# EAGLE board All_in_One_Boards_V1.0 (EAGLE 9.6.2), part 1 of 2
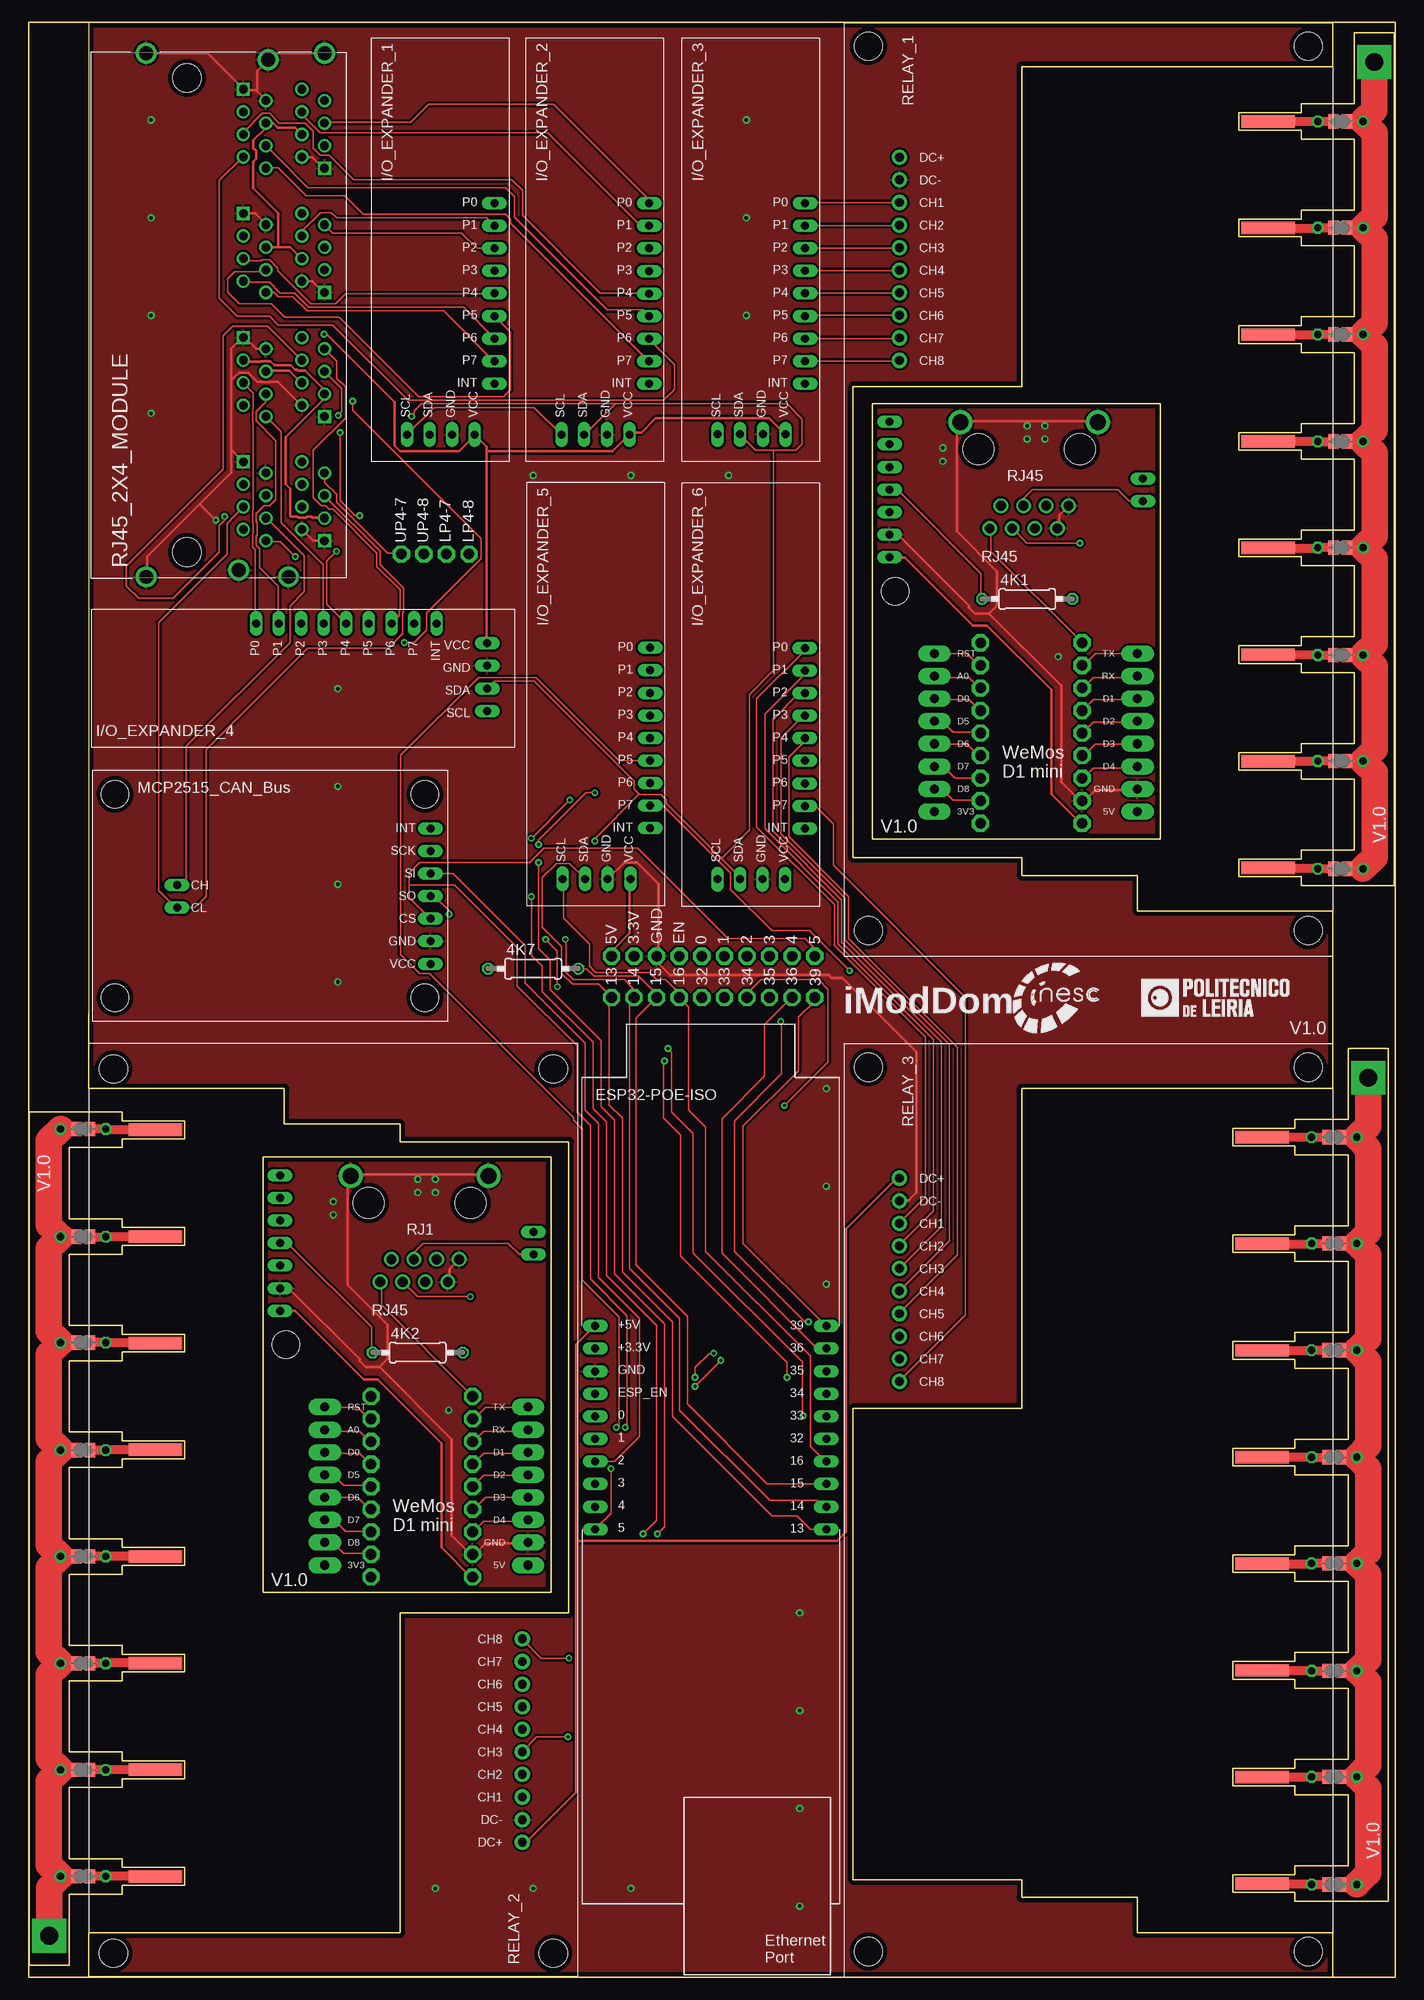
[diagram p0: board, top side]
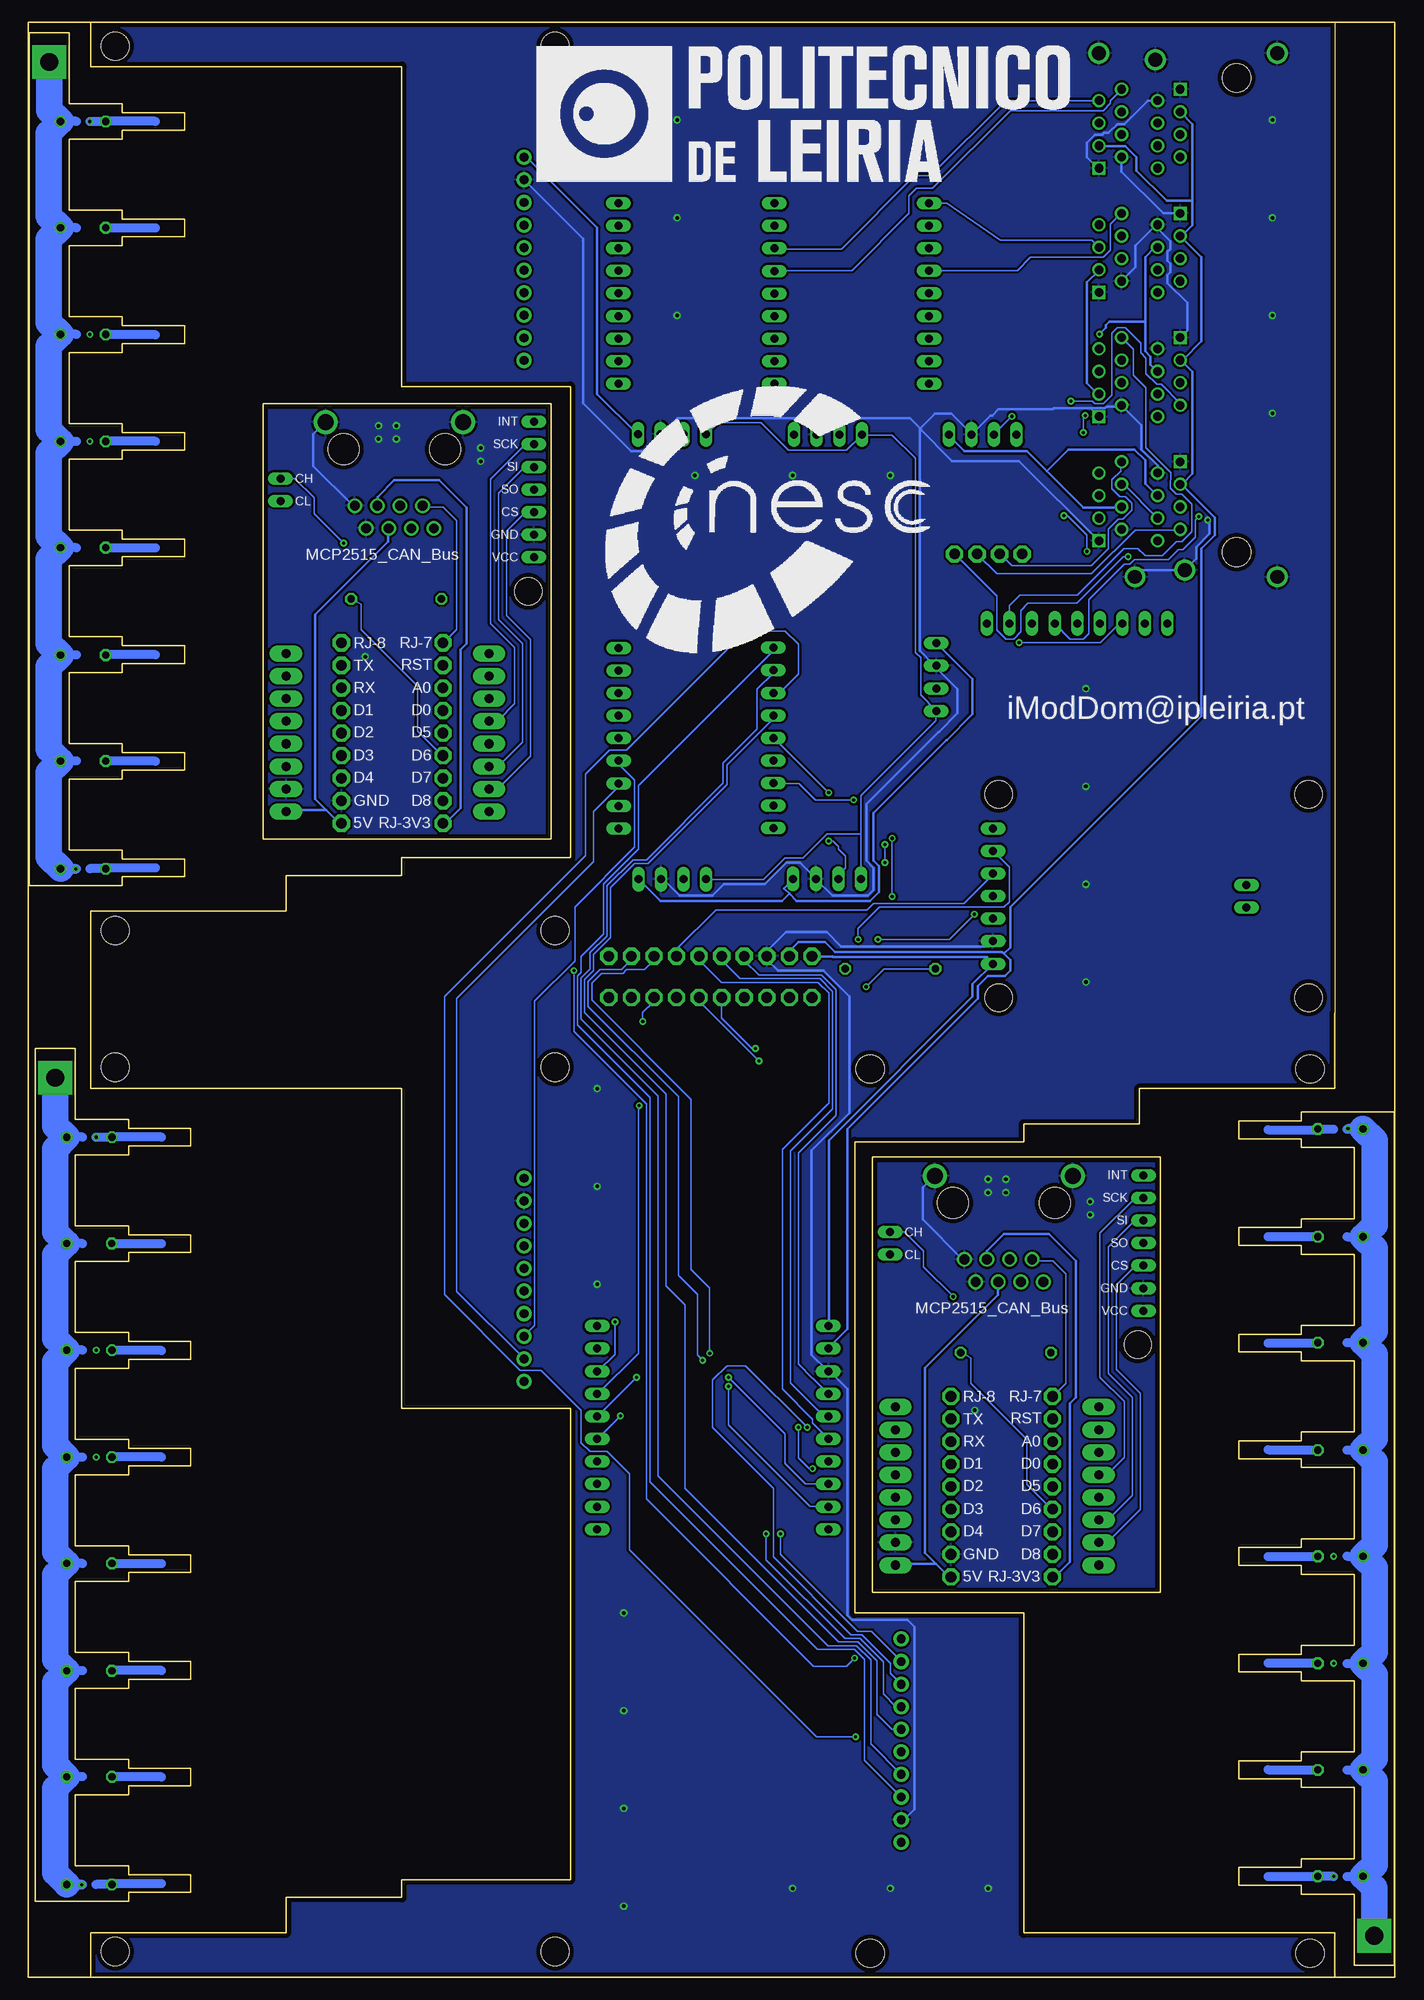
[diagram p1: board, bottom side, seen from below]

Size 153.75 x 220 mm. Coordinates in mm from the lower left corner, seen from the top.
Outline: 6.75,0 146.75,0 146.75,5 124.75,5 124.75,9 111.75,9 111.75,11 92.75,11 92.75,64 111.75,64 111.75,100 146.75,100 146.75,120 124.75,120 124.75,124 111.75,124 111.75,126 92.75,126 92.75,179 111.75,179 111.75,215 146.75,215 146.75,220
Outline: 146.75,220 6.75,220 6.75,108.5 6.75,100 28.75,100 28.75,96 41.75,96 41.75,94 60.75,94 60.75,41 41.75,41 41.75,5 6.75,5 6.75,0
Outline: 6.75,0 0,0 0,220 146.75,220
Outline: 146.75,220 153.75,220 153.75,0 6.75,0
Outline: 94.95,128.1 94.95,177.1 127.35,177.1 127.35,128.1 94.95,128.1
Outline: 26.35,43.3 26.35,92.3 58.75,92.3 58.75,43.3 26.35,43.3
Copper layers (1*16): Top 0.035mm / dielectric 1.5mm / Bottom 0.035mm
Design rules "default *": minimum track width 6mil, minimum drill 0.35mm, track to track 0.25mm, track to pad 0.25mm, pad to pad 6mil, via to via 6mil, smd to smd 6mil, copper to edge 0.5mm, drill to drill 6mil, minimum pad ring 10mil, minimum via ring 8mil, stop-mask expansion 4mil, vias tented up to drill 0mil, thermal gap 10mil
Net classes: 0 default: width 0.15 mm; 1 +5V: width 0.305 mm; 2 GND: width 0.305 mm; 3 +3.3V: width 0.305 mm; 4 SCL: width 0.15 mm; 5 SDA: width 0.15 mm

## Footprints (pad centres in the part's own frame; a part is rotated, then mirrored left to right if it is on the bottom)
0207/10 = drill 0.813 octagon: 1 -5.08,0; 2 5.08,0
ESP-POE = drill 0.9 pad 1.3 long: 0 0,-10.16; 1 0,-12.7; 2 0,-15.24; 3 0,-17.78; 3V3 0,-2.54; 4 0,-20.32; 5 0,-22.86; 5V 0,0; 13 26,-22.86; 14 26,-20.32; 15 26,-17.78; 16 26,-15.24; 32 26,-12.7; 33 26,-10.16; 34 26,-7.62; 35 26,-5.08; 36 26,-2.54; 39 26,0; ESP_EN 0,-7.62; GND 0,-5.08
WEMOS-D1-MINI_SEM_LAYOUT = drill 1.016 pad 1.829 long: 3V3 -10.16,-10.16; 5V 12.7,-10.16; A0 -10.16,5.08; D0 -10.16,2.54; D1 12.7,2.54; D2 12.7,0; D3 12.7,-2.54; D4 12.7,-5.08; D5 -10.16,0; D6 -10.16,-2.54; D7 -10.16,-5.08; D8 -10.16,-7.62; GND 12.7,-7.62; RESET -10.16,7.62; RX 12.7,5.08; TX 12.7,7.62
PCF8574-MODULE_ESPELHADO = drill 0.9 pad 1.3 long: GND 0,-5.08; INT 5.71,-9.85; P0 26.03,-9.85; P1 23.49,-9.85; P2 20.95,-9.85; P3 18.41,-9.85; P4 15.87,-9.85; P5 13.33,-9.85; P6 10.79,-9.85; P7 8.25,-9.85; SCL 0,0; SDA 0,-2.54; VCC 0,-7.62
0204/5 = drill 0.813 octagon: 1 -2.54,0; 2 2.54,0
SSR_M_SEM_LIGACOES = drill 1 pad 1.7: CH1 17.58,3.5; CH2 20.12,3.5; CH3 22.66,3.5; CH4 25.2,3.5; CH5 27.74,3.5; CH6 30.28,3.5; CH7 32.82,3.5; CH8 35.36,3.5; DC+ 12.5,3.5; DC- 15.04,3.5 | hole 3.2: 0,0; 99.5,0; 99.5,49.5; 0,49.5
ALI-RJ45_SEM_LAYOUT = drill 1.1: 1 -4.445,6.35; 2 -3.175,8.89; 3 -1.905,6.35; 4 -0.635,8.89; 5 0.635,6.35; 6 1.905,8.89; 7 3.175,6.35; 8 4.445,8.89 | drill 1.8: P$1 -7.75,-3.05; P$2 7.75,-3.05 | hole 3.5: -5.715,0; 5.715,0
TE_5569262-1 = drill 0.97 square: LP1-1 0,0; LP2-1 13.97,0; LP3-1 27.94,0; LP4-1 41.91,0; UP1-1 8.89,9.14; UP2-1 22.86,9.14; UP3-1 36.83,9.14; UP4-1 50.8,9.14 | drill 0.97: LP1-2 1.27,2.54; LP1-3 2.54,0; LP1-4 3.81,2.54; LP1-5 5.08,0; LP1-6 6.35,2.54; LP1-7 7.62,0; LP1-8 8.89,2.54; LP2-2 15.24,2.54; LP2-3 16.51,0; LP2-4 17.78,2.54; LP2-5 19.05,0; LP2-6 20.32,2.54; LP2-7 21.59,0; LP2-8 22.86,2.54; LP3-2 29.21,2.54; LP3-3 30.48,0; LP3-4 31.75,2.54; LP3-5 33.02,0; LP3-6 34.29,2.54; LP3-7 35.56,0; LP3-8 36.83,2.54; LP4-2 43.18,2.54; LP4-3 44.45,0; LP4-4 45.72,2.54; LP4-5 46.99,0; LP4-6 48.26,2.54; LP4-7 49.53,0; LP4-8 50.8,2.54; UP1-2 7.62,6.6; UP1-3 6.35,9.14; UP1-4 5.08,6.6; UP1-5 3.81,9.14; UP1-6 2.54,6.6; UP1-7 1.27,9.14; UP1-8 0,6.6; UP2-2 21.59,6.6; UP2-3 20.32,9.14; UP2-4 19.05,6.6; UP2-5 17.78,9.14; UP2-6 16.51,6.6; UP2-7 15.24,9.14; UP2-8 13.97,6.6; UP3-2 35.56,6.6; UP3-3 34.29,9.14; UP3-4 33.02,6.6; UP3-5 31.75,9.14; UP3-6 30.48,6.6; UP3-7 29.21,9.14; UP3-8 27.94,6.6; UP4-2 49.53,6.6; UP4-3 48.26,9.14; UP4-4 46.99,6.6; UP4-5 45.72,9.14; UP4-6 44.45,6.6; UP4-7 43.18,9.14; UP4-8 41.91,6.6 | drill 1.57: S1 -4.06,-10.92; S2 54.87,-10.92; S3 -4.06,9.14; S4 54.11,-0.51; S5 -3.3,2.79; S6 54.87,5.08 | hole 3.25: -1.27,-6.35; 52.08,-6.35
SJ = smd 1.168 x 1.6: 1 -0.762,0; 2 0.762,0
TP = drill 1.2 pad 1.93 octagon: P$1 0,0
MCP2515_MODULE_SEM_LIGACOES = drill 0.9 pad 1.3 long: CH -27.925,12.703; CL -27.925,10.163; CS 0.605,8.923; GND 0.605,6.383; INT 0.605,19.083; MISO 0.605,11.463; MOSI 0.605,14.003; SCK 0.605,16.543; VCC 0.605,3.843 | hole 3.1: -0.035,0.013; -0.035,22.913; -34.935,22.913; -34.935,0.013
MCP2515_MODULE_SEM_LAYOUT = drill 0.9 pad 1.3 long: CH 28.52,-6.38; CL 28.52,-8.92; CS 0,-10.16; GND 0,-12.7; INT 0,0; MISO 0,-7.62; MOSI 0,-5.08; SCK 0,-2.54; VCC 0,-15.24 | hole 3.1: 0.63,-19.07
SHUNT = smd 1.4 x 6: P$1 -85,-3.3; P$2 -73,-3.3; P$3 -61,-3.3; P$4 -49,-3.3; P$5 -37,-3.3; P$6 -25,-3.3; P$7 -13,-3.3; P$8 -1,-3.3 | drill 2 pad 3.81 square: P$9 5.692,-15.254

## Placement (x,y rotation side)
4K1  [0207/10]  112.35,155.1 0 top
4K2  [0207/10]  43.75,70.3 0 top
4K7  [0207/10]  56.75,113.5 0 top
ESP32-POE-ISO  ESP-POE  [ESP-POE]  63.73,73.28 0 top
ESP8266D1MINI  [WEMOS-D1-MINI_SEM_LAYOUT]  112.07,141.34 0 top
ESP8266D1MINI1  [WEMOS-D1-MINI_SEM_LAYOUT]  43.47,56.54 0 top
I/O_EXPANDER_1  PCF8574-MODULE_ESPELHADO  [PCF8574-MODULE_ESPELHADO]  42.56,173.62 90 top
I/O_EXPANDER_2  PCF8574-MODULE_ESPELHADO  [PCF8574-MODULE_ESPELHADO]  59.96,173.6 90 top
I/O_EXPANDER_3  PCF8574-MODULE_ESPELHADO  [PCF8574-MODULE_ESPELHADO]  77.51,173.62 90 top
I/O_EXPANDER_4  PCF8574-MODULE_ESPELHADO  [PCF8574-MODULE_ESPELHADO]  51.59,142.5 180 top
I/O_EXPANDER_5  PCF8574-MODULE_ESPELHADO  [PCF8574-MODULE_ESPELHADO]  60.07,123.59 90 top
I/O_EXPANDER_6  PCF8574-MODULE_ESPELHADO  [PCF8574-MODULE_ESPELHADO]  77.49,123.56 90 top
R1  [0204/5]  146.9,10.45 180 top
R2  [0204/5]  146.9,22.57 180 top
R3  [0204/5]  146.9,34.49 180 top
R4  [0204/5]  146.9,46.58 0 bottom
R5  [0204/5]  146.9,58.53 180 top
R6  [0204/5]  146.9,70.57 180 top
R7  [0204/5]  146.9,82.57 180 top
R8  [0204/5]  146.9,94.53 180 top
R9  [0204/5]  6.1,95.45 0 top
R10  [0204/5]  6.1,83.33 0 top
R11  [0204/5]  147.6,124.75 180 top
R12  [0204/5]  6.1,71.41 0 top
R13  [0204/5]  6.1,59.32 180 bottom
R14  [0204/5]  6.1,47.37 0 top
R15  [0204/5]  6.1,35.33 0 top
R16  [0204/5]  6.1,23.33 0 top
R17  [0204/5]  6.1,11.37 0 top
R18  [0204/5]  147.6,136.87 180 top
R19  [0204/5]  147.6,148.79 180 top
R20  [0204/5]  147.6,160.88 0 bottom
R21  [0204/5]  147.6,172.83 180 top
R22  [0204/5]  147.6,184.87 180 top
R23  [0204/5]  147.6,196.87 180 top
R24  [0204/5]  147.6,208.83 180 top
RELAY_1  SSR_M_FULL_SEM_LIGACOES  [SSR_M_SEM_LIGACOES]  94.49,217.3 270 top
RELAY_2  SSR_M_FULL_SEM_LIGACOES  [SSR_M_SEM_LIGACOES]  59.03,2.7 90 top
RELAY_3  SSR_M_FULL_SEM_LIGACOES  [SSR_M_SEM_LIGACOES]  94.49,102.41 270 top
RJ1  ALI-RJ45_SEM_LAYOUT  [ALI-RJ45_SEM_LAYOUT]  43.97,87.14 180 top
RJ45  ALI-RJ45_SEM_LAYOUT  [ALI-RJ45_SEM_LAYOUT]  112.57,171.94 180 top
RJ45_2X4_MODULE  5569262-1  [TE_5569262-1]  24.13,212.46 270 top
SJ1  [SJ]  146.9,58.53 180 top
SJ2  [SJ]  146.9,82.57 180 top
SJ3  [SJ]  146.9,94.53 180 top
SJ4  [SJ]  146.9,10.45 180 top
SJ5  [SJ]  146.9,22.57 180 top
SJ6  [SJ]  146.9,34.49 180 top
SJ7  [SJ]  146.9,46.58 180 top
SJ8  [SJ]  146.9,70.58 180 top
SJ9  [SJ]  6.1,47.37 0 top
SJ10  [SJ]  147.6,172.83 180 top
SJ11  [SJ]  6.1,23.33 0 top
SJ12  [SJ]  6.1,11.37 0 top
SJ13  [SJ]  6.1,95.45 0 top
SJ14  [SJ]  6.1,83.33 0 top
SJ15  [SJ]  6.1,71.41 0 top
SJ16  [SJ]  6.1,59.32 0 top
SJ17  [SJ]  147.6,196.87 180 top
SJ18  [SJ]  6.1,35.32 0 top
SJ19  [SJ]  147.6,208.83 180 top
SJ20  [SJ]  147.6,124.75 180 top
SJ21  [SJ]  147.6,136.87 180 top
SJ22  [SJ]  147.6,148.79 180 top
SJ23  [SJ]  147.6,160.88 180 top
SJ24  [SJ]  147.6,184.88 180 top
U$1  TP  [TP]  41.91,160.16 90 top
U$2  TP  [TP]  65.57,114.9 90 top
U$3  TP  [TP]  107.1,147.63 0 top
U$4  TP  [TP]  44.45,160.16 0 bottom
U$5  TP  [TP]  46.99,160.16 0 top
U$6  TP  [TP]  68.11,114.9 90 bottom
U$7  TP  [TP]  70.65,114.9 90 top
U$8  TP  [TP]  73.19,114.9 90 top
U$9  TP  [TP]  75.73,114.9 90 top
U$10  TP  [TP]  78.27,114.9 90 top
U$11  TP  [TP]  80.81,114.9 90 top
U$12  TP  [TP]  83.35,114.9 90 bottom
U$13  TP  [TP]  85.89,114.9 90 bottom
U$14  TP  [TP]  88.43,114.9 90 top
U$15  TP  [TP]  88.43,110.26 270 bottom
U$16  TP  [TP]  85.89,110.26 270 top
U$17  TP  [TP]  83.35,110.26 270 top
U$18  TP  [TP]  80.81,110.26 270 top
U$19  TP  [TP]  78.27,110.26 270 top
U$20  TP  [TP]  75.73,110.26 270 top
U$21  TP  [TP]  73.19,110.26 270 top
U$22  TP  [TP]  70.65,110.26 270 top
U$23  TP  [TP]  68.11,110.26 270 top
U$24  TP  [TP]  65.57,110.26 270 top
U$25  TP  [TP]  49.53,160.16 0 top
U$26  MCP2515_MODULE_SEM_LIGACOES  [MCP2515_MODULE_SEM_LIGACOES]  44.6,110.2 0 top
U$27  TP  [TP]  107.1,145.09 0 top
U$28  TP  [TP]  107.1,142.55 0 top
U$29  TP  [TP]  107.1,140.01 0 top
U$30  TP  [TP]  107.1,137.47 0 top
U$31  MCP2515_MODULE_SEM_LAYOUT  [MCP2515_MODULE_SEM_LAYOUT]  96.87,175.04 0 top
U$32  TP  [TP]  107.1,134.93 0 top
U$33  TP  [TP]  107.1,132.39 0 top
U$34  TP  [TP]  107.1,129.85 0 top
U$35  TP  [TP]  118.53,147.63 0 top
U$36  TP  [TP]  118.53,145.09 0 top
U$37  TP  [TP]  118.53,142.55 0 top
U$38  TP  [TP]  118.53,140.01 0 top
U$39  TP  [TP]  118.53,137.47 0 top
U$40  TP  [TP]  118.53,134.93 0 top
U$41  TP  [TP]  118.53,132.39 0 top
U$42  TP  [TP]  118.53,129.85 0 top
U$43  TP  [TP]  107.1,150.17 0 top
U$44  TP  [TP]  118.53,150.17 0 top
U$45  MCP2515_MODULE_SEM_LAYOUT  [MCP2515_MODULE_SEM_LAYOUT]  28.27,90.24 0 top
U$46  TP  [TP]  38.5,62.83 0 top
U$47  TP  [TP]  38.5,60.29 0 top
U$48  TP  [TP]  38.5,57.75 0 top
U$49  TP  [TP]  38.5,55.21 0 top
U$50  TP  [TP]  38.5,52.67 0 top
U$51  TP  [TP]  38.5,50.13 0 top
U$52  TP  [TP]  38.5,47.59 0 top
U$53  TP  [TP]  38.5,45.05 0 top
U$54  TP  [TP]  49.93,62.83 0 top
U$55  TP  [TP]  49.93,60.29 0 top
U$56  TP  [TP]  49.93,57.75 0 top
U$57  TP  [TP]  49.93,55.21 0 top
U$58  TP  [TP]  49.93,52.67 0 top
U$59  TP  [TP]  49.93,50.13 0 top
U$60  TP  [TP]  49.93,47.59 0 top
U$61  TP  [TP]  49.93,45.05 0 top
U$62  TP  [TP]  38.5,65.37 0 top
U$63  TP  [TP]  49.93,65.37 0 top
U$64  SHUNT  [SHUNT]  136.17,209.84 90 top
U$65  SHUNT  [SHUNT]  135.47,95.54 90 top
U$66  SHUNT  [SHUNT]  17.53,10.36 270 top

## Library data of the parts
4K1 4K2 4K7 R1-R24 = rcl; SPICEPREFIX: R
ESP32-POE-ISO = ESP-POE-RevB
ESP8266D1MINI ESP8266D1MINI1 = esp8266modules
I/O_EXPANDER_1-I/O_EXPANDER_6 = PCF8574_Module
RELAY_1-RELAY_3 = Solid-State-Relay_Module
RJ1 RJ45 = AliExpressRJ45
RJ45_2X4_MODULE = RJ45_2x4; AVAILABILITY: Good; CENTERLINE_PITCH: 1.02 mm[.04 in]; COMMENT: 5569262-1; DESCRIPTION: Conn RJ-45 F 64 POS 2.54mm Solder RA Thru-Hole 64 Terminal 8 Port Cat 5 Tray; EU_ROHS_COMPLIANCE: Compliant; MF: TE Connectivity; MP: 5569262-1; NUMBER_OF_POSITIONS: 8; PACKAGE: None; PRICE: None; PURCHASE-URL: https://pricing.snapeda.com/search/part/5569262-1/?ref=eda
SJ1-SJ24 = jumper
U$1-U$25 U$27-U$30 U$32-U$44 U$46-U$63 = edurobotParts
U$26 U$31 U$45 = MCP2515_Module
U$64-U$66 = Shunt_V1.0

## Nets
+3V3 [+3.3V]: ESP32-POE-ISO.3V3 RJ45_2X4_MODULE.LP1-3 RJ45_2X4_MODULE.LP2-3 RJ45_2X4_MODULE.LP3-3 RJ45_2X4_MODULE.LP4-3 RJ45_2X4_MODULE.UP1-3 RJ45_2X4_MODULE.UP2-3 RJ45_2X4_MODULE.UP3-3 RJ45_2X4_MODULE.UP4-3 U$6.P$1
+5V [+5V]: ESP32-POE-ISO.5V I/O_EXPANDER_1.VCC I/O_EXPANDER_2.VCC I/O_EXPANDER_3.VCC I/O_EXPANDER_4.VCC I/O_EXPANDER_5.VCC I/O_EXPANDER_6.VCC RELAY_1.DC+ RELAY_2.DC+ RELAY_3.DC+ RJ45_2X4_MODULE.LP1-4 RJ45_2X4_MODULE.LP2-4 RJ45_2X4_MODULE.LP3-4 RJ45_2X4_MODULE.LP4-4 RJ45_2X4_MODULE.UP1-4 RJ45_2X4_MODULE.UP2-4 RJ45_2X4_MODULE.UP3-4 RJ45_2X4_MODULE.UP4-4 U$2.P$1 U$26.VCC
GND [GND]: ESP32-POE-ISO.GND I/O_EXPANDER_1.GND I/O_EXPANDER_2.GND I/O_EXPANDER_3.GND I/O_EXPANDER_4.GND I/O_EXPANDER_5.GND I/O_EXPANDER_6.GND RELAY_1.DC- RELAY_2.DC- RELAY_3.DC- RJ45_2X4_MODULE.LP1-1 RJ45_2X4_MODULE.LP1-2 RJ45_2X4_MODULE.LP2-1 RJ45_2X4_MODULE.LP2-2 RJ45_2X4_MODULE.LP3-1 RJ45_2X4_MODULE.LP3-2 RJ45_2X4_MODULE.LP4-1 RJ45_2X4_MODULE.LP4-2 RJ45_2X4_MODULE.S1 RJ45_2X4_MODULE.S2 RJ45_2X4_MODULE.S3 RJ45_2X4_MODULE.S4 RJ45_2X4_MODULE.S5 RJ45_2X4_MODULE.S6 RJ45_2X4_MODULE.UP1-1 RJ45_2X4_MODULE.UP1-2 RJ45_2X4_MODULE.UP2-1 RJ45_2X4_MODULE.UP2-2 RJ45_2X4_MODULE.UP3-1 RJ45_2X4_MODULE.UP3-2 RJ45_2X4_MODULE.UP4-1 RJ45_2X4_MODULE.UP4-2 U$7.P$1 U$26.GND
GND1 [GND]: ESP8266D1MINI.GND RJ45.1 RJ45.2 RJ45.P$1 RJ45.P$2 U$31.GND U$41.P$1
GND2 [GND]: ESP8266D1MINI1.GND RJ1.1 RJ1.2 RJ1.P$1 RJ1.P$2 U$45.GND U$60.P$1
N$1 [SCL]: I/O_EXPANDER_1.P7 RJ45_2X4_MODULE.LP2-8
N$2 [SCL]: I/O_EXPANDER_1.P6 RJ45_2X4_MODULE.LP2-7
N$3 [SCL]: I/O_EXPANDER_1.P5 RJ45_2X4_MODULE.LP2-6
N$4: ESP32-POE-ISO.ESP_EN U$8.P$1
N$5: ESP32-POE-ISO.0 U$9.P$1
N$6: ESP32-POE-ISO.1 U$10.P$1
N$7: ESP32-POE-ISO.2 U$11.P$1 U$26.MOSI
N$8: ESP32-POE-ISO.3 U$12.P$1
N$9: ESP32-POE-ISO.4 U$13.P$1
N$10: ESP32-POE-ISO.5 U$14.P$1 U$26.CS
N$11: ESP32-POE-ISO.39 U$15.P$1
N$12: ESP32-POE-ISO.36 U$16.P$1
N$13: ESP32-POE-ISO.35 U$17.P$1
N$14: ESP32-POE-ISO.34 U$18.P$1
N$15: ESP32-POE-ISO.33 U$19.P$1
N$16: ESP32-POE-ISO.32 U$20.P$1
N$17 [+3.3V]: RJ45.3 U$34.P$1
N$18: 4K7.2 ESP32-POE-ISO.15 U$22.P$1
N$19: ESP32-POE-ISO.14 U$23.P$1 U$26.SCK
N$20: RJ45.7 U$43.P$1
N$21: I/O_EXPANDER_3.P0 RELAY_1.CH1
N$22: I/O_EXPANDER_3.P1 RELAY_1.CH2
N$23: I/O_EXPANDER_3.P2 RELAY_1.CH3
N$24: I/O_EXPANDER_3.P3 RELAY_1.CH4
N$25: I/O_EXPANDER_3.P4 RELAY_1.CH5
N$26 [SCL]: I/O_EXPANDER_1.P4 RJ45_2X4_MODULE.LP2-5
N$27: I/O_EXPANDER_3.P5 RELAY_1.CH6
N$28: I/O_EXPANDER_3.P6 RELAY_1.CH7
N$29: I/O_EXPANDER_3.P7 RELAY_1.CH8
N$30: I/O_EXPANDER_6.P0 RELAY_3.CH1
N$31: I/O_EXPANDER_6.P1 RELAY_3.CH2
N$32: I/O_EXPANDER_6.P2 RELAY_3.CH3
N$33: I/O_EXPANDER_6.P3 RELAY_3.CH4
N$34: I/O_EXPANDER_6.P4 RELAY_3.CH5
N$35: I/O_EXPANDER_6.P5 RELAY_3.CH6
N$36: I/O_EXPANDER_6.P6 RELAY_3.CH7
N$37: I/O_EXPANDER_6.P7 RELAY_3.CH8
N$38: I/O_EXPANDER_5.P0 RELAY_2.CH1
N$39: I/O_EXPANDER_5.P1 RELAY_2.CH2
N$40: I/O_EXPANDER_5.P2 RELAY_2.CH3
N$41: I/O_EXPANDER_5.P3 RELAY_2.CH4
N$42: I/O_EXPANDER_5.P4 RELAY_2.CH5
N$43: I/O_EXPANDER_5.P5 RELAY_2.CH6
N$44: I/O_EXPANDER_5.P6 RELAY_2.CH7
N$45: I/O_EXPANDER_5.P7 RELAY_2.CH8
N$46 [SCL]: I/O_EXPANDER_1.P3 RJ45_2X4_MODULE.UP2-8
N$47 [SCL]: I/O_EXPANDER_1.P2 RJ45_2X4_MODULE.UP2-7
N$48 [SCL]: I/O_EXPANDER_1.P1 RJ45_2X4_MODULE.UP2-6
N$49 [SCL]: I/O_EXPANDER_1.P0 RJ45_2X4_MODULE.UP2-5
N$50 [SCL]: I/O_EXPANDER_2.P0 RJ45_2X4_MODULE.UP1-5
N$51 [SCL]: I/O_EXPANDER_2.P1 RJ45_2X4_MODULE.UP1-6
N$52 [SCL]: I/O_EXPANDER_2.P2 RJ45_2X4_MODULE.UP1-7
N$53 [SCL]: I/O_EXPANDER_2.P3 RJ45_2X4_MODULE.UP1-8
N$54 [SCL]: I/O_EXPANDER_2.P4 RJ45_2X4_MODULE.LP1-5
N$55 [SCL]: I/O_EXPANDER_2.P5 RJ45_2X4_MODULE.LP1-6
N$56 [SCL]: I/O_EXPANDER_2.P6 RJ45_2X4_MODULE.LP1-7
N$57 [SCL]: I/O_EXPANDER_2.P7 RJ45_2X4_MODULE.LP1-8
N$58 [SCL]: RJ45_2X4_MODULE.LP4-5 RJ45_2X4_MODULE.UP4-5 U$26.CL
N$59: RJ45.8 U$44.P$1
N$60 [SCL]: I/O_EXPANDER_4.P7 RJ45_2X4_MODULE.UP3-8
N$61 [SCL]: I/O_EXPANDER_4.P6 RJ45_2X4_MODULE.UP3-7
N$62 [SCL]: I/O_EXPANDER_4.P5 RJ45_2X4_MODULE.UP3-6
N$63 [SCL]: I/O_EXPANDER_4.P4 RJ45_2X4_MODULE.UP3-5
N$64: I/O_EXPANDER_4.P0 RJ45_2X4_MODULE.LP3-5
N$65: I/O_EXPANDER_4.P1 RJ45_2X4_MODULE.LP3-6
N$66: I/O_EXPANDER_4.P2 RJ45_2X4_MODULE.LP3-7
N$67: I/O_EXPANDER_4.P3 RJ45_2X4_MODULE.LP3-8
N$68: 4K7.1 U$26.MISO
N$69: RJ45_2X4_MODULE.UP4-7 U$1.P$1
N$70: RJ45_2X4_MODULE.UP4-8 U$4.P$1
N$71: RJ45_2X4_MODULE.LP4-7 U$5.P$1
N$72: RJ45_2X4_MODULE.LP4-8 U$25.P$1
N$73 [SCL]: RJ45_2X4_MODULE.LP4-6 RJ45_2X4_MODULE.UP4-6 U$26.CH
N$74: ESP8266D1MINI.RESET U$3.P$1
N$75: ESP8266D1MINI.A0 U$27.P$1
N$76: ESP8266D1MINI.D0 U$28.P$1
N$77: ESP8266D1MINI.D5 U$29.P$1 U$31.SCK
N$78: 4K1.2 ESP8266D1MINI.D6 U$30.P$1
N$79: ESP8266D1MINI.D7 U$31.MOSI U$32.P$1
N$80: ESP8266D1MINI.D8 U$31.CS U$33.P$1
N$81: ESP8266D1MINI.D4 U$40.P$1
N$82: ESP8266D1MINI.D3 U$39.P$1
N$83: ESP8266D1MINI.D2 U$38.P$1
N$84: ESP8266D1MINI.D1 U$37.P$1
N$85: ESP8266D1MINI.RX U$36.P$1
N$86: ESP8266D1MINI.TX U$35.P$1
N$87 [+5V]: ESP8266D1MINI.5V RJ45.4 U$31.VCC U$42.P$1
N$88: RJ45.5 U$31.CL
N$89: RJ45.6 U$31.CH
N$90: 4K1.1 U$31.MISO
N$91 [+3.3V]: RJ1.3 U$53.P$1
N$92: RJ1.7 U$62.P$1
N$93: RJ1.8 U$63.P$1
N$94: ESP8266D1MINI1.RESET U$46.P$1
N$95: ESP8266D1MINI1.A0 U$47.P$1
N$96: ESP8266D1MINI1.D0 U$48.P$1
N$97: ESP8266D1MINI1.D5 U$45.SCK U$49.P$1
N$98: 4K2.2 ESP8266D1MINI1.D6 U$50.P$1
N$99: ESP8266D1MINI1.D7 U$45.MOSI U$51.P$1
N$100: ESP8266D1MINI1.D8 U$45.CS U$52.P$1
N$101: ESP8266D1MINI1.D4 U$59.P$1
N$102: ESP8266D1MINI1.D3 U$58.P$1
N$103: ESP8266D1MINI1.D2 U$57.P$1
N$104: ESP8266D1MINI1.D1 U$56.P$1
N$105: ESP8266D1MINI1.RX U$55.P$1
N$106: ESP8266D1MINI1.TX U$54.P$1
N$107 [+5V]: ESP8266D1MINI1.5V RJ1.4 U$45.VCC U$61.P$1
N$108: RJ1.5 U$45.CL
N$109: RJ1.6 U$45.CH
N$110: 4K2.1 U$45.MISO
N$111: R18.2 SJ21.2 U$64.P$2
N$112: R19.2 SJ22.2 U$64.P$3
N$113: R20.2 SJ23.2 U$64.P$4
N$114: R23.2 SJ17.2 U$64.P$7
N$115: R24.2 SJ19.2 U$64.P$8
N$116: R11.2 SJ20.2 U$64.P$1
N$117: R21.2 SJ10.2 U$64.P$5
N$118: R22.2 SJ24.2 U$64.P$6
N$119: R11.1 R18.1 R19.1 R20.1 R21.1 R22.1 R23.1 R24.1 SJ10.1 SJ17.1 SJ19.1 SJ20.1 SJ21.1 SJ22.1 SJ23.1 SJ24.1 U$64.P$9
N$120: R2.2 SJ5.2 U$65.P$2
N$121: R3.2 SJ6.2 U$65.P$3
N$122: R4.2 SJ7.2 U$65.P$4
N$123: R7.2 SJ2.2 U$65.P$7
N$124: R8.2 SJ3.2 U$65.P$8
N$125: R1.2 SJ4.2 U$65.P$1
N$126: R5.2 SJ1.2 U$65.P$5
N$127: R6.2 SJ8.2 U$65.P$6
N$128: R1.1 R2.1 R3.1 R4.1 R5.1 R6.1 R7.1 R8.1 SJ1.1 SJ2.1 SJ3.1 SJ4.1 SJ5.1 SJ6.1 SJ7.1 SJ8.1 U$65.P$9
N$129: R10.2 SJ14.2 U$66.P$2
N$130: R12.2 SJ15.2 U$66.P$3
N$131: R13.2 SJ16.2 U$66.P$4
N$132: R16.2 SJ11.2 U$66.P$7
N$133: R17.2 SJ12.2 U$66.P$8
N$134: R9.2 SJ13.2 U$66.P$1
N$135: R14.2 SJ9.2 U$66.P$5
N$136: R15.2 SJ18.2 U$66.P$6
N$137: R9.1 R10.1 R12.1 R13.1 R14.1 R15.1 R16.1 R17.1 SJ9.1 SJ11.1 SJ12.1 SJ13.1 SJ14.1 SJ15.1 SJ16.1 SJ18.1 U$66.P$9
SCL: ESP32-POE-ISO.16 I/O_EXPANDER_1.SCL I/O_EXPANDER_2.SCL I/O_EXPANDER_3.SCL I/O_EXPANDER_4.SCL I/O_EXPANDER_5.SCL I/O_EXPANDER_6.SCL U$21.P$1
SDA: ESP32-POE-ISO.13 I/O_EXPANDER_1.SDA I/O_EXPANDER_2.SDA I/O_EXPANDER_3.SDA I/O_EXPANDER_4.SDA I/O_EXPANDER_5.SDA I/O_EXPANDER_6.SDA U$24.P$1